# Altium PCB 转接板.PcbDoc
Units mil, origin at the board's own origin, x right, y up, seen from the top; angles counter-clockwise.
Board outline 4891.92 x 3616.33 mil, 2 copper layers (Top Layer, Bottom Layer); 49 components, 51 nets, 100 pads, 458 vias.
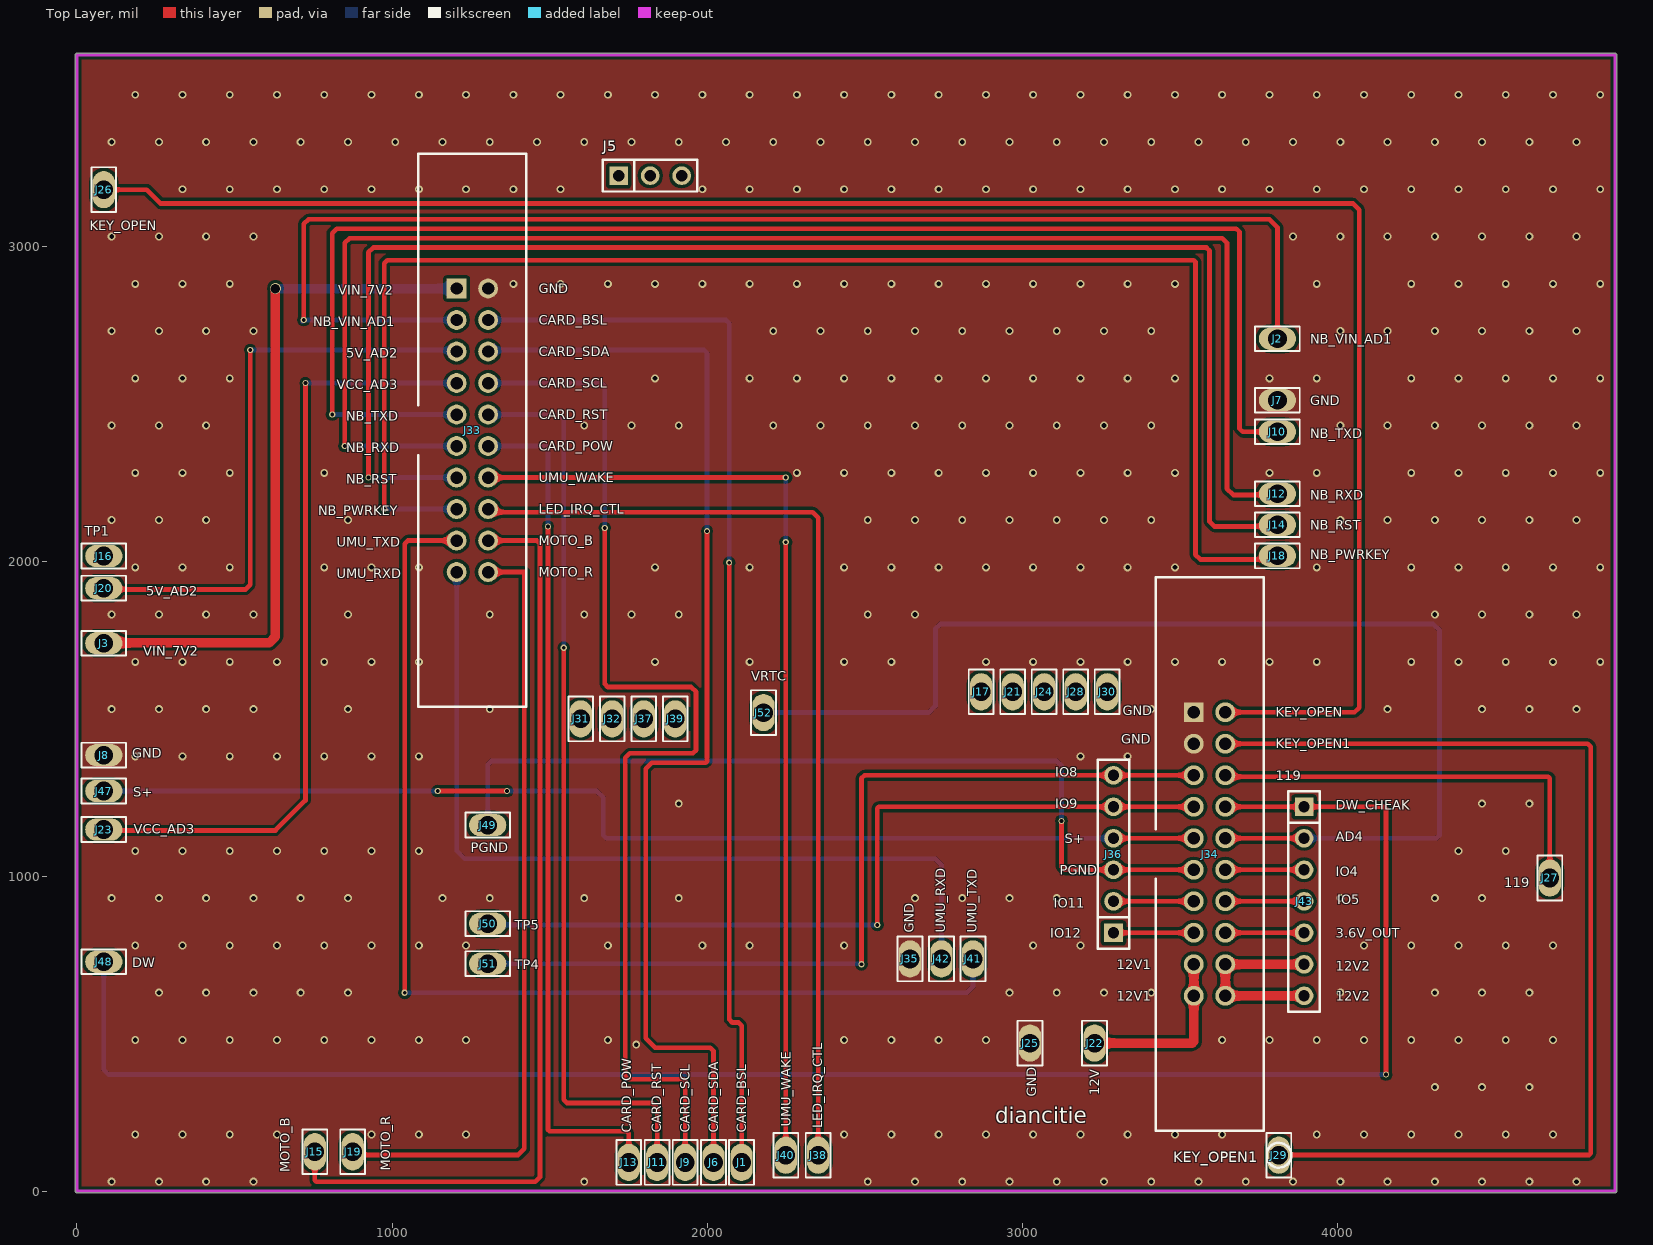
[diagram p0: Top Layer view]
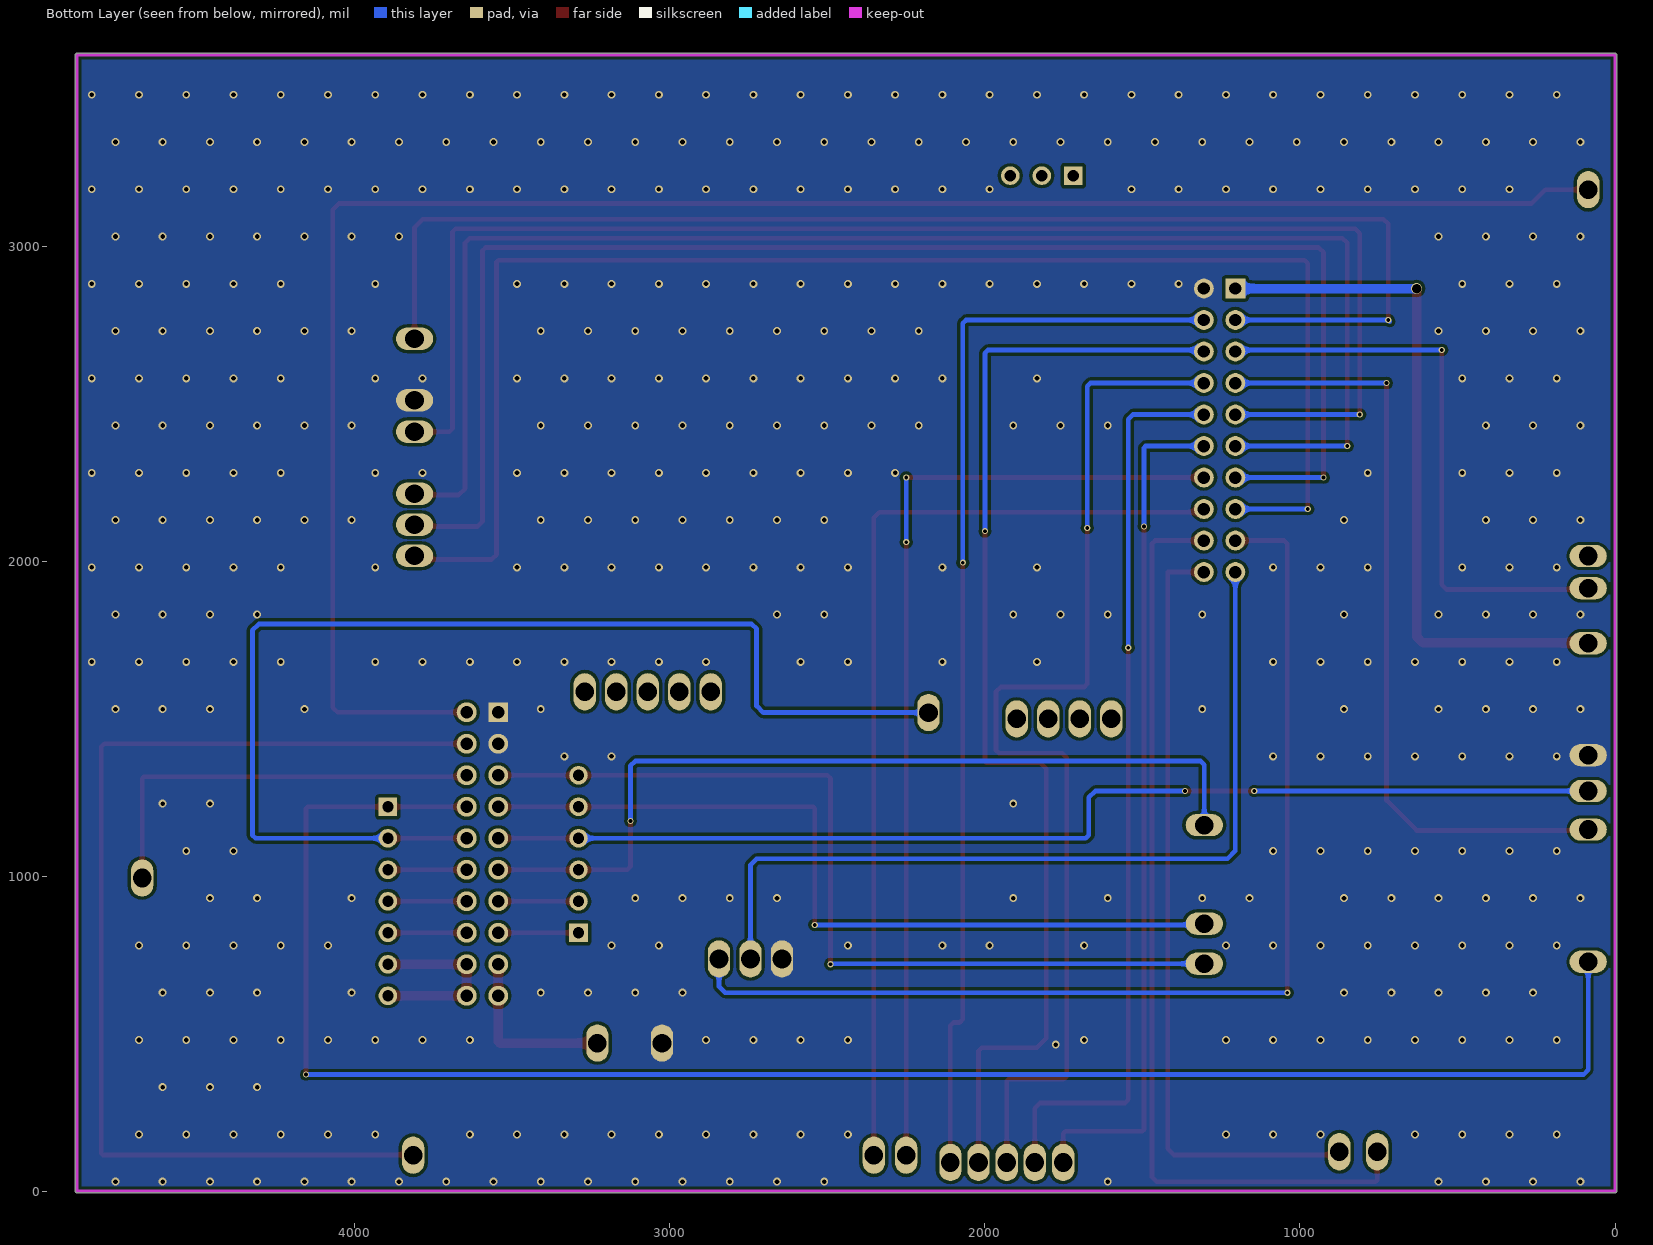
[diagram p1: Bottom Layer view, seen from below]

## Layer stack, top to bottom
Top Solder: solder mask 0.4, Solder Resist, Dk 3.5
Top Layer: signal copper 1.4
Dielectric 1: dielectric 12.6, FR-4, Dk 4.8
Bottom Layer: signal copper 1.4
Bottom Solder: solder mask 0.4, Solder Resist, Dk 3.5

## Board outline
0.1,-5.01 cw(c0,0) -5.02,0 -5.02,3606.23 cw(c0,3606.3) 0,3611.31 4803.15,3611.31 cw(c4803.15,3606.3) 4803.3,3611.31 4881.89,3611.31 ccw(c4881.89,3606.3) 4881.89,3611.31 cw(c4881.89,3606.3) 4886.91,3606.3 4886.91,0 cw(c4881.89,0) 4881.89,-5.01

## Design rules (kind name [scope] priority, off if disabled: settings)
Clearance [All] p1: gap=10 ignorepadtopadclearanceinfootprint=FALSE except(0: Arc-Hole Track-Hole SMDPad-Hole THPad-Hole Via-Hole Fill-Hole Poly-Hole Region-Hole Text-Hole)
PlaneConnect [All] p1: planeconnectstyle=Direct reliefexpansion=20 reliefentries=4 reliefconductorwidth=10 reliefairgap=10
PolygonConnect [All] p1: connectstyle=Direct reliefconductorwidth=10 reliefentries=4 polygonreliefangle="90 Angle" airgapwidth=10
RoutingVias [All] p1: holewidth=11.81 width=19.68 viastyle="Through Hole" minholewidth=11.81 minwidth=19.68 maxholewidth=28 maxwidth=50
SilkToSilkClearance [All] p1: silktosilkclearance=0
SilkToSolderMaskClearance [IsPad] p1: minsilkscreentomaskgap=0 clearancetoexposedcopper=TRUE
SolderMaskExpansion [All] p1: expansion=4
Width [All] p1: maxlimit=30 minlimit=10 preferedwidth=10
27 further rules are at their usual default settings.

## Classes and differential pairs
component class 转接板: J1 J2 J3 J6 J7 J8 J9 J10 J11 J12 J13 J14 J15 J16 J17 J18 J19 J20 J21 J22 J23 J24 J25 J27 J28 J29 J30 J31 J32 J33 J34 J35 J36 J37 J38 J39 J40 J41 J42 J43

## Components (designator, comment, footprint, x,y, rotation, side; value= is the part's Value field where it differs from the comment)
J1 "1Pin" TP5 2109.48,91 r0 top
J2 "1Pin" TP5 3810.51,2705.64 r90 top
J3 "1Pin" TP5 85,1738.96 r90 top
J5 "PIN254_1*3" PIN254_1*3*WXHJ 1719.48,3223.04 r0 top
J6 "1Pin" TP5 2020.48,91 r0 top
J7 "1Pin" TP5 3810.51,2510.37 r90 top
J8 "1Pin" TP5 85,1383.96 r90 top
J9 "1Pin" TP5 1930.48,91 r0 top
J10 "1Pin" TP5 3810.51,2410.37 r90 top
J11 "1Pin" TP5 1841.48,91 r0 top
J12 "1Pin" TP5 3810.51,2213.52 r90 top
J13 "1Pin" TP5 1751.48,91 r0 top
J14 "1Pin" TP5 3810.51,2115.09 r90 top
J15 "1Pin" TP5 755,125 r0 top
J16 "1Pin" TP5 85,2016 r90 top
J17 "1Pin" TP5 2870,1585 r0 top
J18 "1Pin" TP5 3810.51,2016.67 r90 top
J19 "1Pin" TP5 875,125 r0 top
J20 "1Pin" TP5 85,1913.96 r90 top
J21 "1Pin" TP5 2970,1585 r0 top
J22 "1Pin" TP5 3230,470 r180 top
J23 "1Pin" TP5 85,1147.73 r90 top
J24 "1Pin" TP5 3070,1585 r0 top
J25 "1Pin" TP5 3025,470 r0 top
J26 "1Pin" TP5 85,3178.96 r180 top
J27 "1Pin" TP5 4675,993.96 r0 top
J28 "1Pin" TP5 3170,1585 r0 top
J29 "1Pin" TP5 3815,113.96 r0 top
J30 "1Pin" TP5 3270,1585 r0 top
J31 "1Pin" TP5 1599,1499 r0 top
J32 "1Pin" TP5 1699,1499 r0 top
J33 "20Pin" DC254_2*10 1255,2415 r0 top
J34 "20Pin" DC254_2*10 3595,1070 r0 top
J35 "1Pin" TP5 2644,737 r0 top
J36 "PIN254_1*6*WXHJ" PIN254_1*6*1100S 3290,820 r90 top
J37 "1Pin" TP5 1799,1499 r0 top
J38 "1Pin" TP5 2352.48,113.96 r0 top
J39 "1Pin" TP5 1899,1499 r0 top
J40 "1Pin" TP5 2250,113.96 r0 top
J41 "1Pin" TP5 2844,737 r0 top
J42 "1Pin" TP5 2744,737 r0 top
J43 "PIN254_1*7*WXHJ" PIN254_1*7*1100S 3895,1220 r270 top
J47 "1Pin" TP5 85,1270 r90 top (schematic designator J23)
J48 "1Pin" TP5 85,728 r90 top (schematic designator J23)
J49 "1Pin" TP5 1303.48,1162 r90 top (schematic designator J23)
J50 "1Pin" TP5 1303.46,849 r90 top (schematic designator J23)
J51 "1Pin" TP5 1303.48,722 r90 top (schematic designator J23)
J52 "1Pin" TP5 2179,1519 r0 top (schematic designator J39)
KEY_OPEN1 "TEST-PAD" TEST-PAD 3815,113.96 r90 top

## Footprints (in the part's own frame and the unit in brackets; to place one, negate y for a bottom-side part, rotate by r counter-clockwise, add the part's x,y. Pads: shape width x height; smd on the part's side, far side on the other; paste and mask are expansions set on the pad)
DC254_2*10 [mm]
  rect 1.6x1.6 hole 1: 1(-1.27,11.43)
  round 1.6 hole 1: 2(1.27,11.43) 3(-1.27,8.89) 4(1.27,8.89) 5(-1.27,6.35) 6(1.27,6.35) 7(-1.27,3.81) 8(1.27,3.81) 9(-1.27,1.27) 10(1.27,1.27) 11(-1.27,-1.27) 12(1.27,-1.27) 13(-1.27,-3.81) 14(1.27,-3.81) 15(-1.27,-6.35) 16(1.27,-6.35) 17(-1.27,-8.89) 18(1.27,-8.89) 19(-1.27,-11.43) 20(1.27,-11.43)
  silkscreen extent -4.35,-22.3 4.35,22.3
PIN254_1*3*WXHJ [mm]
  rect 1.5x1.5 hole 0.9: 1(0,0)
  round 1.5 hole 0.9: 2(2.54,0) 3(5.08,0)
  silkscreen extent -1.27,-1.27 6.35,1.27
PIN254_1*6*1100S [mm]
  rect 1.5x1.5 hole 0.9: 1(0,0)
  round 1.5 hole 0.9: 2(2.54,0) 3(5.08,0) 4(7.62,0) 5(10.16,0) 6(12.7,0)
  silkscreen extent -1.27,-1.27 13.97,1.27
PIN254_1*7*1100S [mm]
  rect 1.5x1.5 hole 0.9: 1(0,0)
  round 1.5 hole 0.9: 2(2.54,0) 3(5.08,0) 4(7.62,0) 5(10.16,0) 6(12.7,0) 7(15.24,0)
  silkscreen extent -1.27,-1.27 16.51,1.27
TEST-PAD [mm]
  round 1.5 smd: 1(0,0)
  silkscreen extent -1,-1 1,1
TP5 [mm]
  oval 1.8x3 hole 1.5: 1(0,0)
  silkscreen extent -1,-1.8 1,1.8

## Part data
J33 J34: library part 1010902-0139, "DC2 2.54mm 2x10pin,2.54mm间距，2x10pin，32×8.55×27.5mm,母头,双排,双排牛角座", Part Name=DC牛角座, ID=4, Part Number=1010902-0139, SMD/DIP=DIP
J36: library part AD_WXHJ_PinHeader_02, "1*6 ，Φ1.0 ，2.54mm，直脚,无需焊接器件", Part Name=排针, ID=17, Part Number=AD_WXHJ_PinHeader_02, SMD/DIP=DIP
J43: library part AD_WXHJ_PinHeader_02, "1*7 ，Φ1.0 ，2.54mm，直脚,无需焊接器件", Part Name=排针, ID=17, Part Number=AD_WXHJ_PinHeader_02, SMD/DIP=DIP
KEY_OPEN1: library part AD_WXHJ_TEST-PAD_01, "单面焊盘测试点", Part Name=测试点, ID=23, Part Number=AD_WXHJ_TEST-PAD_01, SMD/DIP=SMD

## Via types
v1: diameter 25, hole 15, Top Layer to Bottom Layer, tented both sides, 436 vias
v2: diameter 19.68, hole 11.81, Top Layer to Bottom Layer, tented both sides, 21 vias
v3: diameter 35, hole 30, Top Layer to Bottom Layer, tented both sides, 1 vias

## Nets (pads, with @x,y where several pads share a name; then routed paths per layer and width w, separated by ;. In a path a pad name is that pad's centre, name@x,y a point inside that pad or via, vN(x,y) a via of type N, cw(c..) or ccw(c..) an arc to the next point about the centre after c; other vN are vias at no path point)
12V: J22.1 J34.17 J34.19 | length 562.1
  Top Layer w30: J22.1 3540,470 3545,475 J34.19 J34.17
12V2: J34.18 J34.20 J43.6 J43.7 | length 600
  Top Layer w30: J43.7 J34.20 J34.18 J43.6
119: J27.1 J34.6 | length 1350.2
  Top Layer w15: J34.6@3650,1315 4670,1315 4675,1310 J27.1
  Top Layer w30: J34.6 J34.6@3650,1315
AD1: J2.1 J33.3 | length 4258.2
  Top Layer w15: v2(720,2765) 720,3070 735,3085 3785,3085 3810.51,3059.49 J2.1
  Bottom Layer w15: v2@715,2760 v2(720,2765) J33.3
AD2: J20.1 J33.5 | length 1873.3
  Top Layer w15: J20.1@85,1910 535,1910 550,1925 v2(550,2670)
  Bottom Layer w15: v2(550,2670) 1200,2670 J33.5
AD3: J23.1 J33.7 | length 2424.4
  Top Layer w15: 145,1145 630,1145 725,1240 v2(725,2565)
  Bottom Layer w15: v2(725,2565) J33.7
AD4: J34.10 J43.2 J52.1 | length 3748.3
  Top Layer w15: J34.10 J43.2
  Bottom Layer w15: J52.1 2704,1519 2725,1540 2725,1785 2740,1800 4305,1800 4325,1780 4325,1130 4315,1120 J43.2
Analog_A: 
Analog_B: 
C-POW: 
CARD_BSL: J1.1 J33.4 | length 3461.6
  Top Layer w15: v2(2070,1995) 2070,545 2080,535 2100,535 2110,525 2110,91.52 J1.1
  Bottom Layer w15: J33.4 2060,2765 2070,2755 v2(2070,1995)
CARD_POW: J13.1 J33.12 | length 2710.8
  Top Layer w15: v2(1495,2110) 1495,195 1500,190 1745,190 1751.48,183.52 J13.1
  Bottom Layer w15: J33.12 1490,2365 1495,2360 v2(1495,2110)
CARD_RST: J11.1 J33.10 | length 2886.2
  Top Layer w15: v2(1545,1725) 1545,290 1555,280 1825,280 1841.48,263.52 J11.1
  Bottom Layer w15: J33.10 1530,2465 1545,2450 v2(1545,1725)
CARD_SCL: J9.1 J33.8 | length 3505.3
  Top Layer w15: v2(1675,2105) 1675,1610 1685,1600 1950,1600 1965,1585 1965,1400 1955,1390 1755,1390 1740,1375 1740,365 1750,355 1925,355 1930.48,349.52 J9.1
  Bottom Layer w15: J33.8 1665,2565 1675,2555 v2(1675,2105)
CARD_SDA: J6.1 J33.6 | length 3642.3
  Top Layer w15: v2(2000,2095) 2000,1365 1995,1360 1825,1360 1805,1340 1805,485 1835,455 2010,455 2020.48,444.52 J6.1
  Bottom Layer w15: J33.6 1310,2670 1990,2670 2000,2660 v2(2000,2095)
DW: J34.8 J43.1 J48.1 | length 5778.4
  Top Layer w15: J34.8 J43.1 4150,1220 4155,1215 v2(4155,370)
  Bottom Layer w15: J48.1 85,385 100,370 v2@4150,370 ; J43.1 J43.1@3900,1225
Forward_trigger: 
GND: J7.1 J8.1 J25.1 J33.2 J34.1 J34.3 J35.1
  other v1: 110,30 260,30 410,30 560,30 1610,30 2510,30 2660,30 2810,30 2960,30 3110,30 3260,30 3410,30 3560,30 3710,30 3860,30 4010,30 4160,30 4310,30 4460,30 4610,30 4760,30 185,180 335,180 485,180 635,180 935,180 1085,180 1235,180 2435,180 2585,180 2735,180 2885,180 3035,180 3185,180 3335,180 3485,180 3635,180 3935,180 4085,180 4235,180 4385,180 4535,180 4685,180 4310,330 4460,330 4610,330 1775,465 185,480 335,480 485,480 635,480 785,480 935,480 1085,480 1235,480 1685,480 2435,480 2585,480 2735,480 2885,480 3635,480 3785,480 3935,480 4085,480 4235,480 4385,480 4535,480 4685,480 260,630 410,630 560,630 710,630 860,630 2960,630 3110,630 3260,630 3410,630 4010,630 4310,630 4460,630 4610,630 185,780 335,780 485,780 635,780 785,780 935,780 1085,780 1235,780 1685,780 1985,780 2135,780 2435,780 3035,780 3185,780 4085,780 4235,780 4385,780 4535,780 4685,780 110,930 260,930 410,930 560,930 710,930 860,930 1160,930 1310,930 1610,930 1910,930 2660,930 2810,930 2960,930 3110,930 4010,930 4310,930 4460,930 185,1080 335,1080 485,1080 635,1080 785,1080 935,1080 1085,1080 4385,1080 4535,1080 1910,1230 4460,1230 4610,1230 185,1380 335,1380 485,1380 635,1380 785,1380 935,1380 1085,1380 3185,1380 3335,1380 110,1530 260,1530 410,1530 560,1530 860,1530 1310,1530 3410,1530 4160,1530 4460,1530 4610,1530 4760,1530 185,1680 335,1680 485,1680 635,1680 785,1680 935,1680 1085,1680 1835,1680 2135,1680 2435,1680 2585,1680 2885,1680 3035,1680 3185,1680 3335,1680 3485,1680 3635,1680 3785,1680 3935,1680 4235,1680 4385,1680 4535,1680 4685,1680 4835,1680 110,1830 260,1830 410,1830 560,1830 860,1830 1310,1830 1610,1830 1760,1830 1910,1830 2510,1830 2660,1830 4310,1830 4460,1830 4610,1830 4760,1830 185,1980 335,1980 485,1980 785,1980 935,1980 1085,1980 1835,1980 2135,1980 2435,1980 2585,1980 2735,1980 2885,1980 3035,1980 3185,1980 3335,1980 3485,1980 3935,1980 4235,1980 4385,1980 4535,1980 4685,1980 4835,1980 110,2130 260,2130 410,2130 860,2130 2510,2130 2660,2130 2810,2130 2960,2130 3110,2130 3260,2130 3410,2130 4010,2130 4160,2130 4310,2130 4460,2130 4610,2130 4760,2130 185,2280 335,2280 485,2280 785,2280 2285,2280 2435,2280 2585,2280 2735,2280 2885,2280 3035,2280 3185,2280 3335,2280 3485,2280 3785,2280 3935,2280 4235,2280 4385,2280 4535,2280 4685,2280 4835,2280 110,2430 260,2430 410,2430 1610,2430 1760,2430 1910,2430 2210,2430 2360,2430 2510,2430 2660,2430 2810,2430 2960,2430 3110,2430 3260,2430 3410,2430 4010,2430 4160,2430 4310,2430 4460,2430 4610,2430 4760,2430 185,2580 335,2580 485,2580 1835,2580 2135,2580 2285,2580 2435,2580 2585,2580 2735,2580 2885,2580 3035,2580 3185,2580 3335,2580 3485,2580 3785,2580 3935,2580 4235,2580 4385,2580 4535,2580 4685,2580 4835,2580 110,2730 260,2730 410,2730 560,2730 2210,2730 2360,2730 2510,2730 2660,2730 2810,2730 2960,2730 3110,2730 3260,2730 3410,2730 4010,2730 4160,2730 4310,2730 4460,2730 4610,2730 4760,2730 185,2880 335,2880 485,2880 1385,2880 1535,2880 1685,2880 1835,2880 1985,2880 2135,2880 2285,2880 2435,2880 2585,2880 2735,2880 2885,2880 3035,2880 3185,2880 3335,2880 3485,2880 3935,2880 4235,2880 4385,2880 4535,2880 4685,2880 4835,2880 110,3030 260,3030 410,3030 560,3030 3860,3030 4010,3030 4160,3030 4310,3030 4460,3030 4610,3030 4760,3030 335,3180 485,3180 635,3180 785,3180 935,3180 1085,3180 1235,3180 1385,3180 1535,3180 1985,3180 2135,3180 2285,3180 2435,3180 2585,3180 2735,3180 2885,3180 3035,3180 3185,3180 3335,3180 3485,3180 3635,3180 3785,3180 3935,3180 4085,3180 4235,3180 4385,3180 4535,3180 4685,3180 4835,3180 110,3330 260,3330 410,3330 560,3330 710,3330 860,3330 1010,3330 1160,3330 1310,3330 1460,3330 1610,3330 1760,3330 1910,3330 2060,3330 2210,3330 2360,3330 2510,3330 2660,3330 2810,3330 2960,3330 3110,3330 3260,3330 3410,3330 3560,3330 3710,3330 3860,3330 4010,3330 4160,3330 4310,3330 4460,3330 4610,3330 4760,3330 185,3480 335,3480 485,3480 635,3480 785,3480 935,3480 1085,3480 1235,3480 1385,3480 1535,3480 1685,3480 1835,3480 1985,3480 2135,3480 2285,3480 2435,3480 2585,3480 2735,3480 2885,3480 3035,3480 3185,3480 3335,3480 3485,3480 3635,3480 3785,3480 3935,3480 4085,3480 4235,3480 4385,3480 4535,3480 4685,3480 4835,3480
IO1: 
IO2: 
IO3: J34.12 J43.3 | length 250
  Top Layer w15: J34.12 J43.3
IO4: J34.14 J43.4 | length 250
  Top Layer w15: J34.14 J43.4
IO5: J34.16 J43.5 | length 250
  Top Layer w15: J34.16 J43.5
IO6: 
IO7: 
IO8: 
IO9: 
IO10: 
IO11: J34.13 J36.2 | length 275
  Top Layer w15: J36.2 J34.13@3565,920
IO12: J34.15 J36.1 | length 275
  Top Layer w15: J36.1 J34.15@3565,820
KEY_OPEN: J26.1 J34.2 | length 6022.7
  Top Layer w15: J26.1 221.04,3178.96 265,3135 4050,3135 4070,3115 4070,1535 4055,1520 J34.2
KEY_OPEN1: J29.1 J34.4 KEY_OPEN1.1 | length 3446.6
  Top Layer w15: J34.4 4795,1420 4805,1410 4805,120 4800,115 3816.04,115 KEY_OPEN1.1
LED_IRQ_CTL: J33.16 J38.1 | length 3091.4
  Top Layer w15: J33.16 1315,2155 2335,2155 2352.48,2137.52 J38.1@2352.48,105
M-POW: 
MOTO_B: J15.1 J33.18 | length 3022.4
  Top Layer w15: J15.1@755,155 755,35 760,30 1455,30 1470,45 1470,2055 1460,2065 J33.18
MOTO_R: J19.1 J33.20 | length 2498.3
  Top Layer w15: J19.1@875,115 1400,115 1420,135 1420,1965 J33.20
NB_PWRKEY: J18.1 J33.15 | length 4792.8
  Top Layer w15: v2(975,2165) 975,2945 985,2955 3545,2955 3550,2950 3550,2020 3565,2005 3798.84,2005 J18.1
  Bottom Layer w15: v2(975,2165) J33.15
NB_RST: J14.1 J33.13 | length 4759.2
  Top Layer w15: v2(925,2265) 925,2980 940,2995 3585,2995 3595,2985 3595,2125 3610,2110 3805.42,2110 J14.1
  Bottom Layer w15: v2(925,2265) J33.13
NB_RXD: J12.1 J33.11 | length 4762.7
  Top Layer w15: v2(850,2365) 850,3010 865,3025 3635,3025 3650,3010 3650,2230 3670,2210 3806.99,2210 J12.1
  Bottom Layer w15: v2(850,2365) J33.11
NB_TXD: J10.1 J33.9 | length 4610.2
  Top Layer w15: v2(810,2465) 810,3040 825,3055 3680,3055 3690,3045 3690,2420 3700,2410 3810.14,2410 J10.1
  Bottom Layer w15: v2(810,2465) J33.9
NetJ4_1: 
PGND: J34.11 J36.3 J49.1 | length 2788.1
  Top Layer w15: v2(3125,1175) 3125,1030 3135,1020 J36.3 J34.11 J34.11@3565,1020
  Bottom Layer w15: J49.1 1303.48,1353.48 1315,1365 3110,1365 3125,1350 v2(3125,1175)
Reverse_trigger: 
S+: J34.9 J36.4 J47.1 | length 3612.4
  Top Layer w15: v2(1145,1270) v2(1365,1270) ; J36.4 J34.9 J34.9@3565,1120
  Bottom Layer w15: J47.1 v2(1145,1270) ; v2(1365,1270) 1650,1270 1670,1250 1670,1130 1680,1120 J36.4
TP4: J34.5 J36.6 J51.1 | length 2860.5
  Top Layer w15: v2(2490,720) 2490,1310 2500,1320 J36.6 J34.5 J34.5@3565,1320
  Bottom Layer w15: J51.1 2492,722 v2(2490,720)
TP5: J34.7 J36.5 J50.1 | length 2635.3
  Top Layer w15: v2(2540,845) 2540,1215 2545,1220 J36.5 J34.7 J34.7@3565,1220
  Bottom Layer w15: J50.1 1307.46,845 v2(2540,845)
UMU_RXD: J33.19 J42.1 | length 2741.2
  Bottom Layer w15: J33.19 1205,1080 1230,1055 2725,1055 2744,1036 J42.1
UMU_TXD: J33.17 J41.1 | length 3494
  Top Layer w15: v2(1040,630) 1040,2055 1050,2065 J33.17
  Bottom Layer w15: v2(1040,630) 2825,630 2844,649 J41.1
UMU_WAKE: J33.14 J40.1 | length 3096
  Top Layer w15: J33.14 v2(2250,2265) ; J40.1 v2(2250,2060)
  Bottom Layer w15: v2(2250,2060) v2(2250,2265)
Vout_3V6_1: 
Vout_7V2_1: J3.1 J33.1 | length 2233.3
  Top Layer w30: J3.1@85,1740 610,1740 630,1760 v3(630,2865)
  Bottom Layer w30: v3(630,2865) J33.1
pads on no net: J5.1 J5.2 J5.3 J16.1 J17.1 J21.1 J24.1 J28.1 J30.1 J31.1 J32.1 J37.1 J39.1

## Polygon pours and split planes (outlines as drawn)
GND on Top Layer "Top Layer-No Net" (solid, remove dead copper, pour order 20): 0.1,-5.01 cw(c0,0) -5.02,0 -5.02,3606.23 cw(c0,3606.3) 0,3611.31 4803.15,3611.31 cw(c4803.15,3606.3) 4803.3,3611.31 4881.89,3611.31 ccw(c4881.89,3606.3) 4881.89,3611.31 cw(c4881.89,3606.3) 4886.91,3606.3 4886.91,0 cw(c4881.89,0) 4881.89,-5.01
GND on Bottom Layer "Top Layer-No Net1" (solid, remove dead copper, pour order 21): 0.1,-5.01 cw(c0,0) -5.02,0 -5.02,3606.23 cw(c0,3606.3) 0,3611.31 4803.15,3611.31 cw(c4803.15,3606.3) 4803.3,3611.31 4881.89,3611.31 ccw(c4881.89,3606.3) 4881.89,3611.31 cw(c4881.89,3606.3) 4886.91,3606.3 4886.91,0 cw(c4881.89,0) 4881.89,-5.01

## Keep-outs
Keep-Out Layer:
  lines w10: 4803.15,3606.3 0,3606.3 ; 0,3606.3 4881.89,3606.3 4881.89,0 0,0 0,3606.3

## Silkscreen, mask and mechanical layers (free items; w line width, h text height)
Top Overlay:
  text "KEY_OPEN" at 40,3050 h30
  text "GND" at 1465,2850 h30
  text "VIN_7V2" at 829.97,2845 h30
  text "CARD_BSL" at 1465,2750 h30
  text "NB_VIN_AD1" at 750,2745 h30
  text "NB_VIN_AD1" at 3915,2690 h30
  text "CARD_SDA" at 1465,2650 h30
  text "5V_AD2" at 854.97,2645 h30
  text "CARD_SCL" at 1465,2550 h30
  text "VCC_AD3" at 824.98,2545 h30
  text "GND" at 3915,2495 h30
  text "CARD_RST" at 1465,2450 h30
  text "NB_TXD" at 854.97,2445 h30
  text "NB_TXD" at 3915,2390 h30
  text "CARD_POW" at 1465,2350 h30
  text "NB_RXD" at 854.97,2345 h30
  text "UMU_WAKE" at 1465,2250 h30
  text "NB_RST" at 854.97,2245 h30
  text "NB_RXD" at 3915,2195 h30
  text "LED_IRQ_CTL" at 1465,2150 h30
  text "NB_PWRKEY" at 765,2145 h30
  text "NB_RST" at 3915,2100 h30
  text "TP1" at 25,2080 h30
  text "MOTO_B" at 1465,2050 h30
  text "UMU_TXD" at 824.98,2045 h30
  text "NB_PWRKEY" at 3915,2005 h30
  text "MOTO_R" at 1465,1950 h30
  text "UMU_RXD" at 824.98,1945 h30
  text "5V_AD2" at 220,1890 h30
  text "VIN_7V2" at 210,1700 h30
  text "VRTC" at 2140,1620 h30
  text "GND" at 3320,1510 h30
  text "KEY_OPEN" at 3805,1505 h30
  text "GND" at 3315,1420 h30
  text "KEY_OPEN1" at 3805,1405 h30
  text "GND" at 175,1375 h30
  text "IO8" at 3105,1315 h30
  text "119" at 3805,1305 h30
  text "S+" at 177.96,1252.5 h30
  text "IO9" at 3105,1215 h30
  text "DW_CHEAK" at 3995,1210 h30
  text "VCC_AD3" at 180,1135 h30
  text "AD4" at 3995,1110 h30
  text "S+" at 3135,1105 h30
  text "PGND" at 1250,1075 h30
  text "PGND" at 3120,1005 h30
  text "IO4" at 3995,1000 h30
  text "119" at 4530,965 h30
  text "IO5" at 4000,910 h30
  text "IO11" at 3100,900 h30
  text "TP5" at 1390,830 h30
  text "GND" at 2656.5,819.96 h30 r90
  text "UMU_RXD" at 2756.5,819.96 h30 r90
  text "UMU_TXD" at 2856.5,819.96 h30 r90
  text "IO12" at 3090,805 h30
  text "3.6V_OUT" at 3995,805 h30
  text "DW" at 175,710 h30
  text "TP4" at 1390,705 h30
  text "12V1" at 3300,705 h30
  text "12V2" at 3995,700 h30
  text "12V1" at 3300,605 h30
  text "12V2" at 3995,605 h30
  text "12V" at 3245,305 h30 r90
  text "GND" at 3045,300 h30 r90
  text "diancitie" at 2915,215 h50
  text "UMU_WAKE" at 2265,205 h30 r90
  text "LED_IRQ_CTL" at 2365,200 h30 r90
  text "CARD_POW" at 1760,185 h30 r90
  text "CARD_RST" at 1855,185 h30 r90
  text "CARD_SCL" at 1945,185 h30 r90
  text "CARD_SDA" at 2035,185 h30 r90
  text "CARD_BSL" at 2125,185 h30 r90
  text "MOTO_R" at 995,65 h30 r90
  text "MOTO_B" at 675,60 h30 r90
Mechanical 18:
  circle w10: c4185.99,1230.95 r68.9
  circle w10: c4185.99,721.1 r68.9
Mechanical 23:
  circle w10: c4185.99,721.1 r68.9
  circle w10: c4185.99,1230.95 r68.9
  lines w10: 4067.44,643.16 ccw(c4107.44,643.16) 4107.44,603.16 4263.44,603.16 ccw(c4263.44,643.16) 4303.44,643.16 4303.44,799.16 ccw(c4263.44,799.16) 4263.44,839.16 4107.44,839.16 ccw(c4107.44,799.16) 4067.44,799.16 4067.44,643.16 ; 4067.44,1153 ccw(c4107.44,1153.01) 4107.44,1113.01 4263.44,1113.01 ccw(c4263.44,1153.01) 4303.44,1153.01 4303.44,1309 ccw(c4263.44,1309.01) 4263.44,1349.01 4107.44,1349.01 ccw(c4107.44,1309.01) 4067.44,1309.01 4067.44,1153
Mechanical 25:
  lines w10: 4067.88,602.99 4067.88,839.21 4304.1,839.21 4304.1,602.99 4067.88,602.99 ; 4067.88,1112.84 4304.1,1112.84 4304.1,1349.06 4067.88,1349.06 4067.88,1112.84